# EAGLE board avr-grundschaltung (EAGLE 4.16)
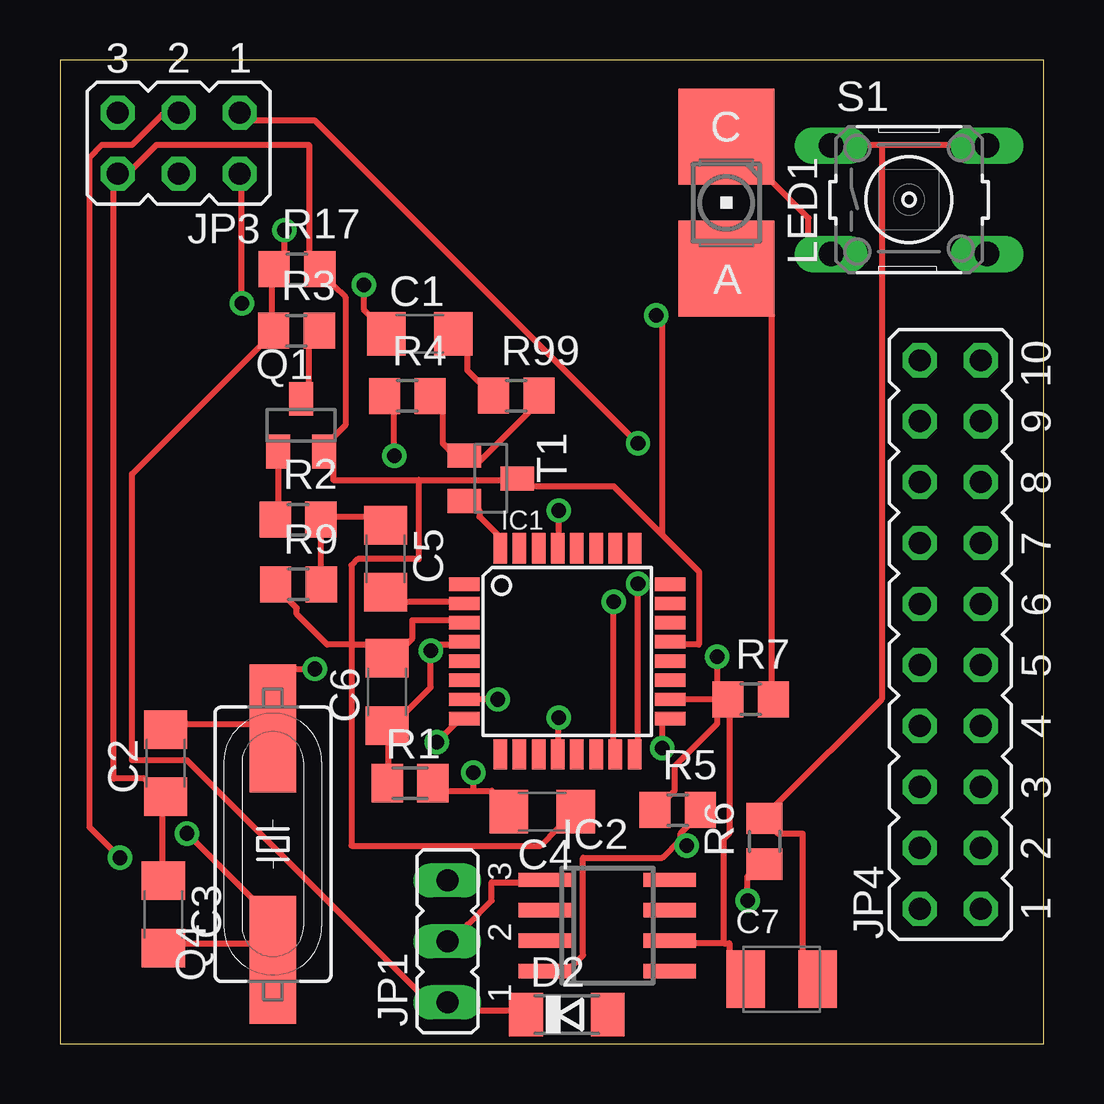
[diagram p0: board, top side]
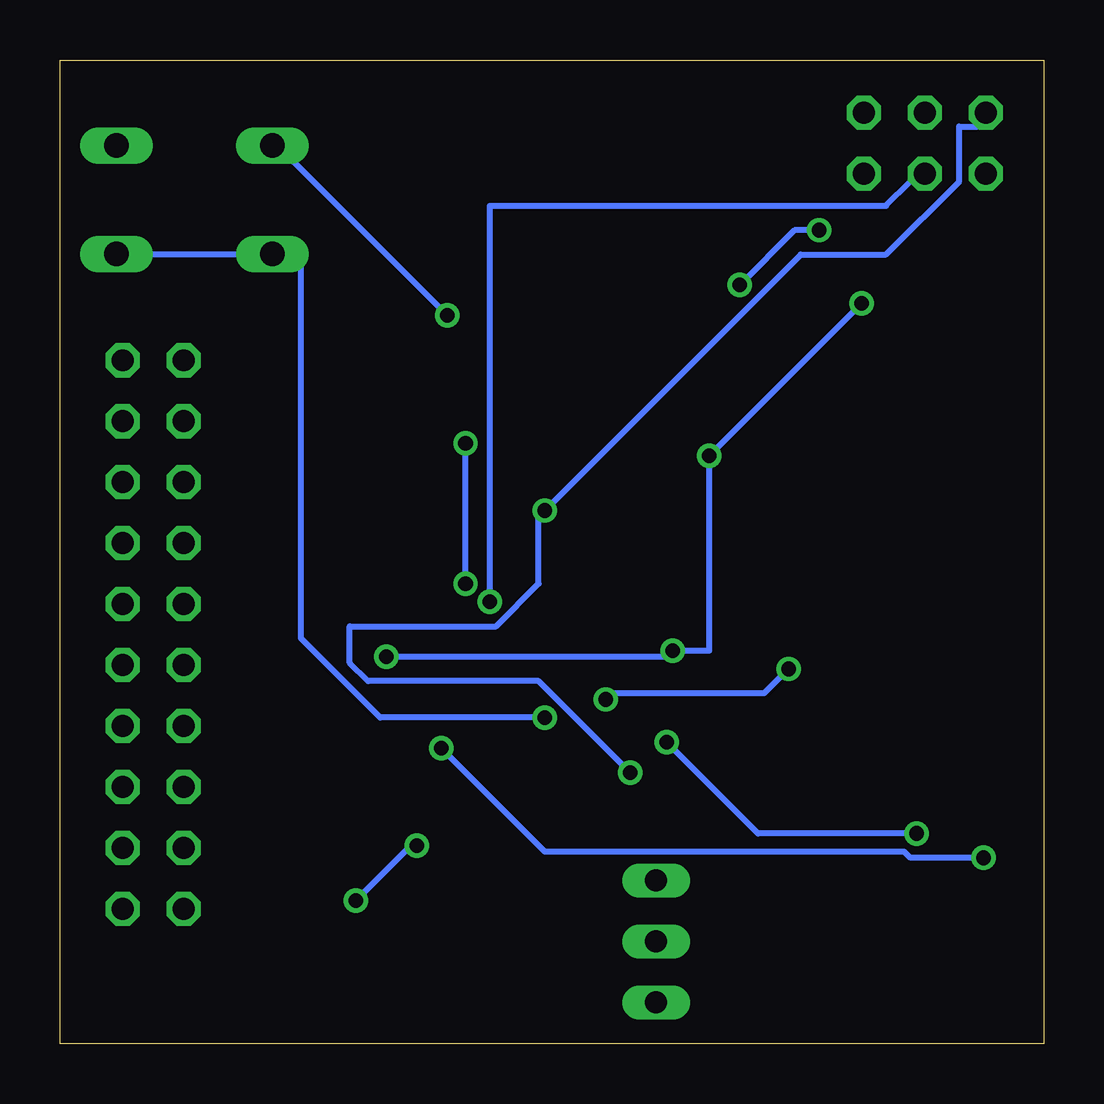
[diagram p1: board, bottom side, seen from below]

Size 41 x 41 mm. Coordinates in mm from the lower left corner, seen from the top.
Outline: 0,0 41,0 41,41 0,41 0,0
Copper layers (1*16): Top 0.035mm / dielectric 1.5mm / Bottom 0.035mm
Design rules "default": minimum track width 10mil, minimum drill 24mil, track to track 15mil, track to pad 10mil, pad to pad 8mil, via to via 8mil, smd to smd 10mil, copper to edge 40mil, drill to drill 8mil, minimum pad ring 10mil, minimum via ring 8mil, stop-mask expansion 4mil, vias tented up to drill 0mil, thermal gap 10mil

## Footprints (pad centres in the part's own frame; a part is rotated, then mirrored left to right if it is on the bottom)
C1206 = smd 1.6 x 1.8: 1 -1.4,0; 2 1.4,0
SMC_B = smd 1.6 x 2.4: + -1.5,0; - 1.5,0
SOD80C = smd 1.4 x 1.8: A 1.7,0; C -1.7,0
TQFP32-08 = smd 1.27 x 0.559: 1 -4.293,2.8; 2 -4.293,2; 3 -4.293,1.2; 4 -4.293,0.4; 5 -4.293,-0.4; 6 -4.293,-1.2; 7 -4.293,-2; 8 -4.293,-2.8; 17 4.293,-2.8; 18 4.293,-2; 19 4.293,-1.2; 20 4.293,-0.4; 21 4.293,0.4; 22 4.293,1.2; 23 4.293,2; 24 4.293,2.8 | smd 0.559 x 1.27: 9 -2.8,-4.293; 10 -2,-4.293; 11 -1.2,-4.293; 12 -0.4,-4.293; 13 0.4,-4.293; 14 1.2,-4.293; 15 2,-4.293; 16 2.8,-4.293; 25 2.8,4.293; 26 2,4.293; 27 1.2,4.293; 28 0.4,4.293; 29 -0.4,4.293; 30 -1.2,4.293; 31 -2,4.293; 32 -2.8,4.293
SO-8 = smd 0.6 x 2.2: 1 -1.905,-2.6; 2 -0.635,-2.6; 3 0.635,-2.6; 4 1.905,-2.6; 5 1.905,2.6; 6 0.635,2.6; 7 -0.635,2.6; 8 -1.905,2.6
JP2 = drill 0.914 long: 1 -2.54,0; 2 0,0; 3 2.54,0
JP3Q = drill 0.914 octagon: 1 -2.54,-1.27; 2 -2.54,1.27; 3 0,-1.27; 4 0,1.27; 5 2.54,-1.27; 6 2.54,1.27
JP10Q = drill 0.914 octagon: 1 -11.43,-1.27; 2 -11.43,1.27; 3 -8.89,-1.27; 4 -8.89,1.27; 5 -6.35,-1.27; 6 -6.35,1.27; 7 -3.81,-1.27; 8 -3.81,1.27; 9 -1.27,-1.27; 10 -1.27,1.27; 11 1.27,-1.27; 12 1.27,1.27; 13 3.81,-1.27; 14 3.81,1.27; 15 6.35,-1.27; 16 6.35,1.27; 17 8.89,-1.27; 18 8.89,1.27; 19 11.43,-1.27; 20 11.43,1.27
P-LCC-2 = smd 4 x 4: A 0,2.75; C 0,-2.75
SOT23 = smd 1 x 1.4: 1 -0.95,-1.1; 2 0.95,-1.1; 3 0,1.1
HC49UP = smd 5.334 x 1.93: 1 -4.826,0; 2 4.826,0
M0805 = smd 1.3 x 1.6: 1 -0.95,0; 2 0.95,0
R0805 = smd 1.3 x 1.5: 1 -0.95,0; 2 0.95,0
B3F-10XX = drill 1.016 long: 1 -3.251,2.261; 2 3.251,2.261; 3 -3.251,-2.261; 4 3.251,-2.261
SOT23-BEC = smd 1 x 1.4: B -0.95,-1.1; C 0,1.1; E 0.95,-1.1

## Placement (x,y rotation side)
C1  100n  [C1206]  15,29.58 0 top
C2  20p  [C1206]  4.41,11.69 90 top
C3  20p  [C1206]  4.32,5.38 270 top
C4  47n  [C1206]  20.1,9.66 180 top
C5  100n  [C1206]  13.57,20.21 270 top
C6  100n  [C1206]  13.64,14.66 90 top
C7  1u  [SMC_B]  30.08,2.68 0 top
D2  1N4148  [SOD80C]  21.13,1.21 0 top
IC1  MEGA8-AI  [TQFP32-08]  21.15,16.34 0 top
IC2  LM317-SO8  [SO-8]  22.82,4.92 270 top
JP1  [JP2]  16.15,4.26 90 top
JP3  [JP3Q]  4.95,37.53 180 top
JP4  [JP10Q]  37.12,17.05 90 top
LED1  [P-LCC-2]  27.77,35.05 180 top
Q1  2N7002  [SOT23]  10.05,25.77 0 top
Q4  8M  [HC49UP]  8.88,8.31 90 top
R1  10k  [M0805]  14.59,10.85 0 top
R2  0  [R0805]  9.93,21.84 0 top
R3  68R  [R0805]  9.86,29.71 0 top
R4  47k  [R0805]  14.48,26.99 0 top
R5  330R  [R0805]  25.75,9.73 0 top
R6  550R  [R0805]  29.37,8.43 90 top
R7  1k  [R0805]  28.79,14.35 0 top
R9  470k  [R0805]  9.94,19.14 0 top
R17  100k  [R0805]  9.88,32.28 0 top
R99  10k  [R0805]  19.02,27 0 top
S1  [B3F-10XX]  35.39,35.17 0 top
T1  BC857A-SMD  [SOT23-BEC]  17.95,23.56 270 top

## Library data of the parts
C1-C7 R1-R7 R9 R17 R99 = rcl
D2 = diode
IC1 = atmel
IC2 Q1 = freebus
JP1 JP3 JP4 = jumper
LED1 = led
Q4 = crystal
S1 = switch-omron
T1 = transistor

## Nets
EIB+: D2.A
EIB_IN: IC1.32 T1.E
EIB_OUT: C5.2 IC1.2
GND [supply]: C2.1 C3.1 C4.1 C6.2 C7.- IC1.3 IC1.21 JP3.6 Q1.2 R6.2 R9.1 R17.2 S1.1 S1.2 T1.C
MISO: IC1.16 JP3.1
MOSI: IC1.15 JP3.4
N$1 [supply]: C1.2 R99.1
N$2: IC2.4 R5.2 R6.1
N$3 [supply]: C1.1 D2.C JP1.1 R3.1 R17.1
N$4: LED1.A R7.2
N$5 [supply]: Q1.3 R3.2
N$6 [supply]: IC2.1 JP1.2
N$7 [supply]: R4.2 R99.2 T1.B
N$8: C2.2 IC1.7 Q4.2
N$9: C3.2 IC1.8 Q4.1
N$12: C5.1 R2.2 R9.2
N$23: Q1.1 R2.1
OC1A/PWM1: IC1.13
PB0: IC1.12 LED1.C S1.3 S1.4
PC0/ADC0: IC1.23
PC1/ADC1: IC1.24
PC2/ADC2: IC1.25
PC3/ADC3: IC1.26
PC4/ADC4/SDA: IC1.27
PC5/ADC5/SCL: IC1.28
PD0/RXD: IC1.30
PD1/TXD: IC1.31
PD3/INT1: IC1.1
PD5/T1: IC1.9
PD6/AIN0: IC1.10
PD7/AIN1: IC1.11
RESET: C4.2 IC1.29 JP3.5 R1.2
SCK: IC1.17 JP3.3
VCC: C6.1 C7.+ IC1.4 IC1.18 IC2.6 JP3.2 R1.1 R4.1 R5.1 R7.1
VEXT [supply]: JP1.3

## Tracks (layer width: path | path; a pad name or v marks a point on that pad's centre or on a via)
EIB_IN
  Top 0.254: IC1.32 18.25,21.2 17.49,21.97 17.49,22.22 T1.E
EIB_OUT
  Top 0.254: IC1.2 16.47,18.41 14.44,18.41 C5.2
GND  (via drill 0.61)
  Top 0.254: C7.- 30.95,3.68 30.95,8.76 29.93,8.76 R6.2 29.93,10.03 34.25,14.35 34.25,37.46 | 34.25,37.46 37.3,37.46 S1.2 | 34.25,37.46 33.49,37.46 S1.1 | IC1.3 16.47,17.65 14.69,17.65 14.69,16.89 14.44,16.63 C6.2 12.92,16.63 12.15,16.63 | 12.15,16.63 11.14,16.63 9.87,17.9 9.87,18.16 9.61,18.41 R9.1 | 12.15,16.63 12.15,8.25 20.03,8.25 20.79,9.01 C4.1 | 25.11,21.2 23.08,23.24 19.52,23.24 T1.C 18.5,23.49 14.95,23.49 | 25.11,21.2 26.63,19.68 26.63,16.63 25.87,16.63 IC1.21 | C3.1 4.28,7.49 4.28,9.52 C2.1 3.52,11.04 2.25,11.04 2.25,35.68 JP3.6 3.01,36.44 4.03,37.46 10.38,37.46 10.38,32.89 R17.2 11.39,31.62 11.9,31.11 11.9,25.78 11.39,25.27 Q1.2 11.39,24 11.39,23.49 14.95,23.49 | 12.15,16.63 12.15,19.93 12.41,20.19 14.95,20.19 14.95,23.49 | v24.85,30.35 25.11,30.09 25.11,21.2
  Bottom 0.254: v24.85,30.35 31.2,36.7 S1.1
MISO  (via drill 0.61)
  Top 0.254: v24.09,19.17 24.09,12.57 IC1.16 | v24.09,25.01 10.63,38.48 8.09,38.48 JP3.1
  Bottom 0.254: v24.09,19.17 v24.09,25.01
MOSI  (via drill 0.61)
  Top 0.254: v23.08,18.41 23.08,12.57 IC1.15
  Bottom 0.254: v23.08,18.41 23.08,34.92 6.57,34.92 5.55,35.94 JP3.4
N$1
  Top 0.254: R99.1 17.49,27.55 16.98,28.06 16.98,28.82 C1.2
N$2  (via drill 0.61)
  Top 0.254: 25.87,8.5 25.87,8.76 26.12,9.01 R5.2 | 25.87,8.5 25.11,7.74 21.81,7.74 21.81,3.68 21.3,3.17 IC2.4 | v28.66,5.96 28.66,6.98 R6.1 | 25.87,8.5 v26.12,8.25
  Bottom 0.254: v28.66,5.96 26.38,8.25 v26.12,8.25
N$3  (via drill 0.61)
  Top 0.254: D2.C 18.76,1.39 17.49,1.39 JP1.1 14.95,2.15 5.3,11.81 3.01,11.81 3.01,23.74 8.34,29.08 R3.1 8.85,30.35 8.85,31.62 R17.1 9.36,32.89 v9.36,33.9 | v12.66,31.62 12.66,30.6 12.92,30.35 C1.1
  Bottom 0.254: v12.66,31.62 10.38,33.9 v9.36,33.9
N$4
  Top 0.254: R7.2 29.68,14.85 29.68,30.35 LED1.A
N$5
  Top 0.254: Q1.3 10.38,27.55 10.38,29.08 R3.2
N$6
  Top 0.254: IC2.1 19.27,6.73 18,6.73 18,5.96 16.98,4.95 JP1.2
N$7
  Top 0.254: R4.2 15.96,26.28 15.96,25.01 16.22,24.76 T1.B 17.49,24.25 19.52,26.28 R99.2
N$8  (via drill 0.61)
  Top 0.254: v18.25,14.35 17.49,14.35 IC1.7 | v10.63,15.62 9.61,15.62 Q4.2 8.09,13.33 5.3,13.33 C2.2
  Bottom 0.254: v18.25,14.35 18,14.6 11.65,14.6 v10.63,15.62
N$9  (via drill 0.61)
  Top 0.254: v15.71,12.57 16.47,13.33 IC1.8 | v5.3,8.76 8.09,5.96 Q4.1 8.09,4.19 5.04,4.19 C3.2
  Bottom 0.254: v15.71,12.57 11.9,8.76 v5.3,8.76
N$12
  Top 0.254: C5.1 12.92,21.97 11.39,21.97 R2.2 10.88,21.2 10.88,19.68 R9.2
N$23
  Top 0.254: Q1.1 9.11,24 9.11,22.47 R2.1
PB0  (via drill 0.61)
  Top 0.254: v20.79,13.58 20.79,12.57 IC1.12 | LED1.C 29.68,35.94 31.2,34.41 31.2,33.65 S1.3
  Bottom 0.254: v20.79,13.58 27.65,13.58 30.95,16.89 30.95,32.38 S1.3 33.49,32.89 37.3,32.89 S1.4
RESET  (via drill 0.61)
  Top 0.254: 17.23,10.54 18,10.54 C4.2 | 17.23,10.54 15.96,10.54 R1.2 | v20.79,22.22 20.79,21.2 IC1.29 | 17.23,10.54 v17.23,11.3
  Bottom 0.254: JP3.5 2.76,38.22 3.52,38.22 3.52,35.94 6.57,32.89 10.12,32.89 v20.79,22.22 21.04,21.97 21.04,19.17 22.82,17.39 28.92,17.39 28.92,15.87 28.16,15.11 21.04,15.11 v17.23,11.3
SCK  (via drill 0.61)
  Top 0.254: v25.11,12.31 25.11,13.33 IC1.17 | v2.5,7.74 1.23,9.01 1.23,36.95 1.74,37.46 3.01,37.46 4.28,38.73 JP3.3
  Bottom 0.254: v25.11,12.31 20.79,8 5.8,8 5.55,7.74 v2.5,7.74
VCC  (via drill 0.61)
  Top 0.254: 27.65,4.19 27.9,4.19 27.9,3.68 C7.+ | 27.65,4.19 26.38,4.19 IC2.6 | IC1.18 25.87,14.35 R7.1 | R5.1 25.36,10.28 25.62,10.54 25.62,11.55 27.39,13.33 27.39,13.84 R7.1 | 27.65,4.19 27.65,8.5 27.9,8.76 27.9,13.84 R7.1 | IC1.4 16.47,16.63 15.46,16.63 v15.46,16.38 15.46,14.85 14.44,13.84 C6.1 13.68,12.57 13.68,11.55 R1.1 | v13.93,24.51 13.93,26.28 R4.1 | v7.58,30.86 7.58,35.68 JP3.2 | v27.39,16.12 27.39,14.85 R7.1
  Bottom 0.254: v7.58,30.86 v13.93,24.51 13.93,16.38 v15.46,16.38 15.71,16.12 v27.39,16.12